# Altium PCB EGT_CAN.PcbDoc
Units mm, origin at the board's own origin, x right, y up, seen from the top; angles counter-clockwise.
Board outline 53.34 x 39.37 mm, 2 copper layers (Top Layer, Bottom Layer); 29 components, 12 nets, 64 pads, 14 vias.
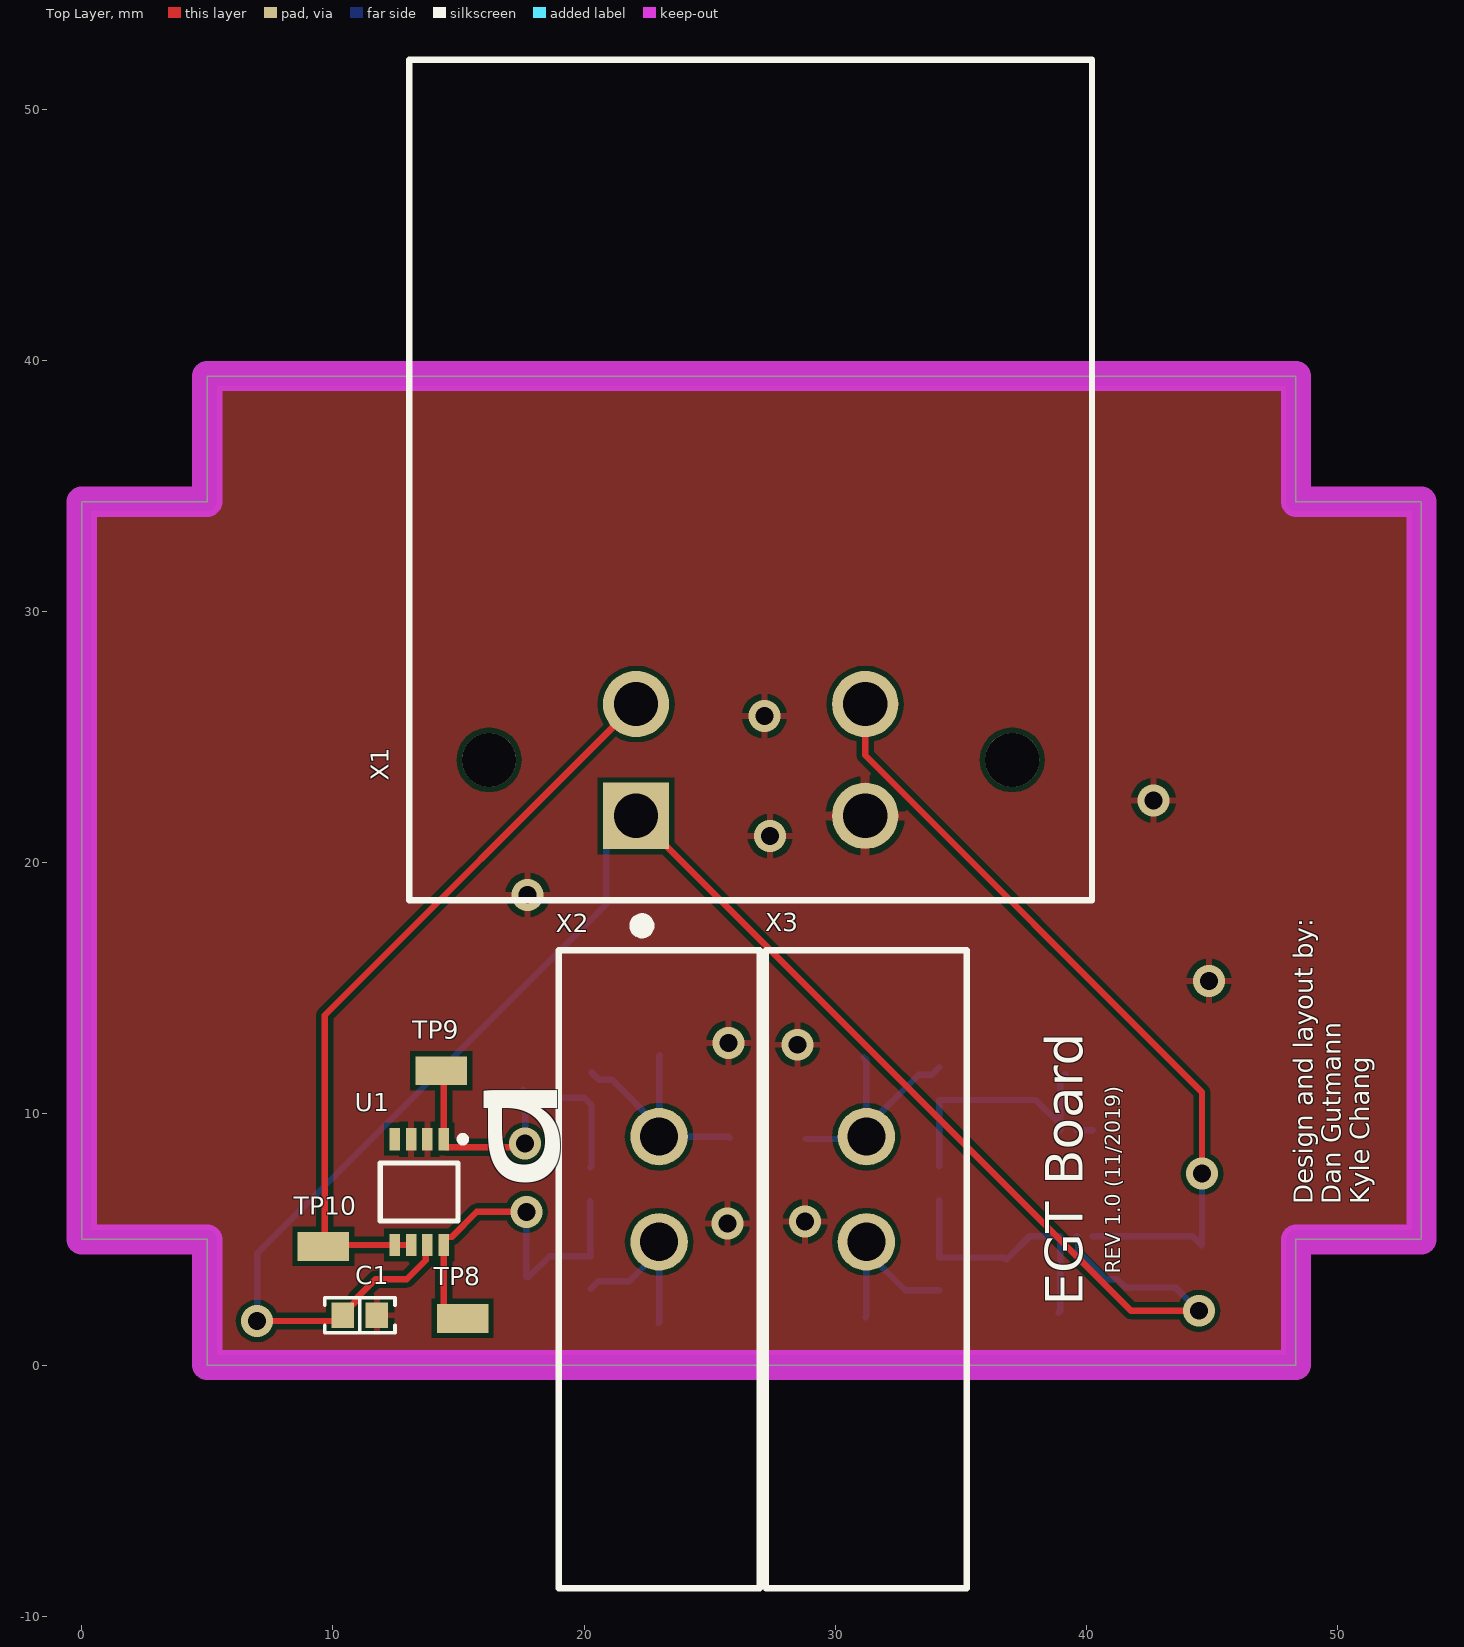
[diagram p0: Top Layer view]
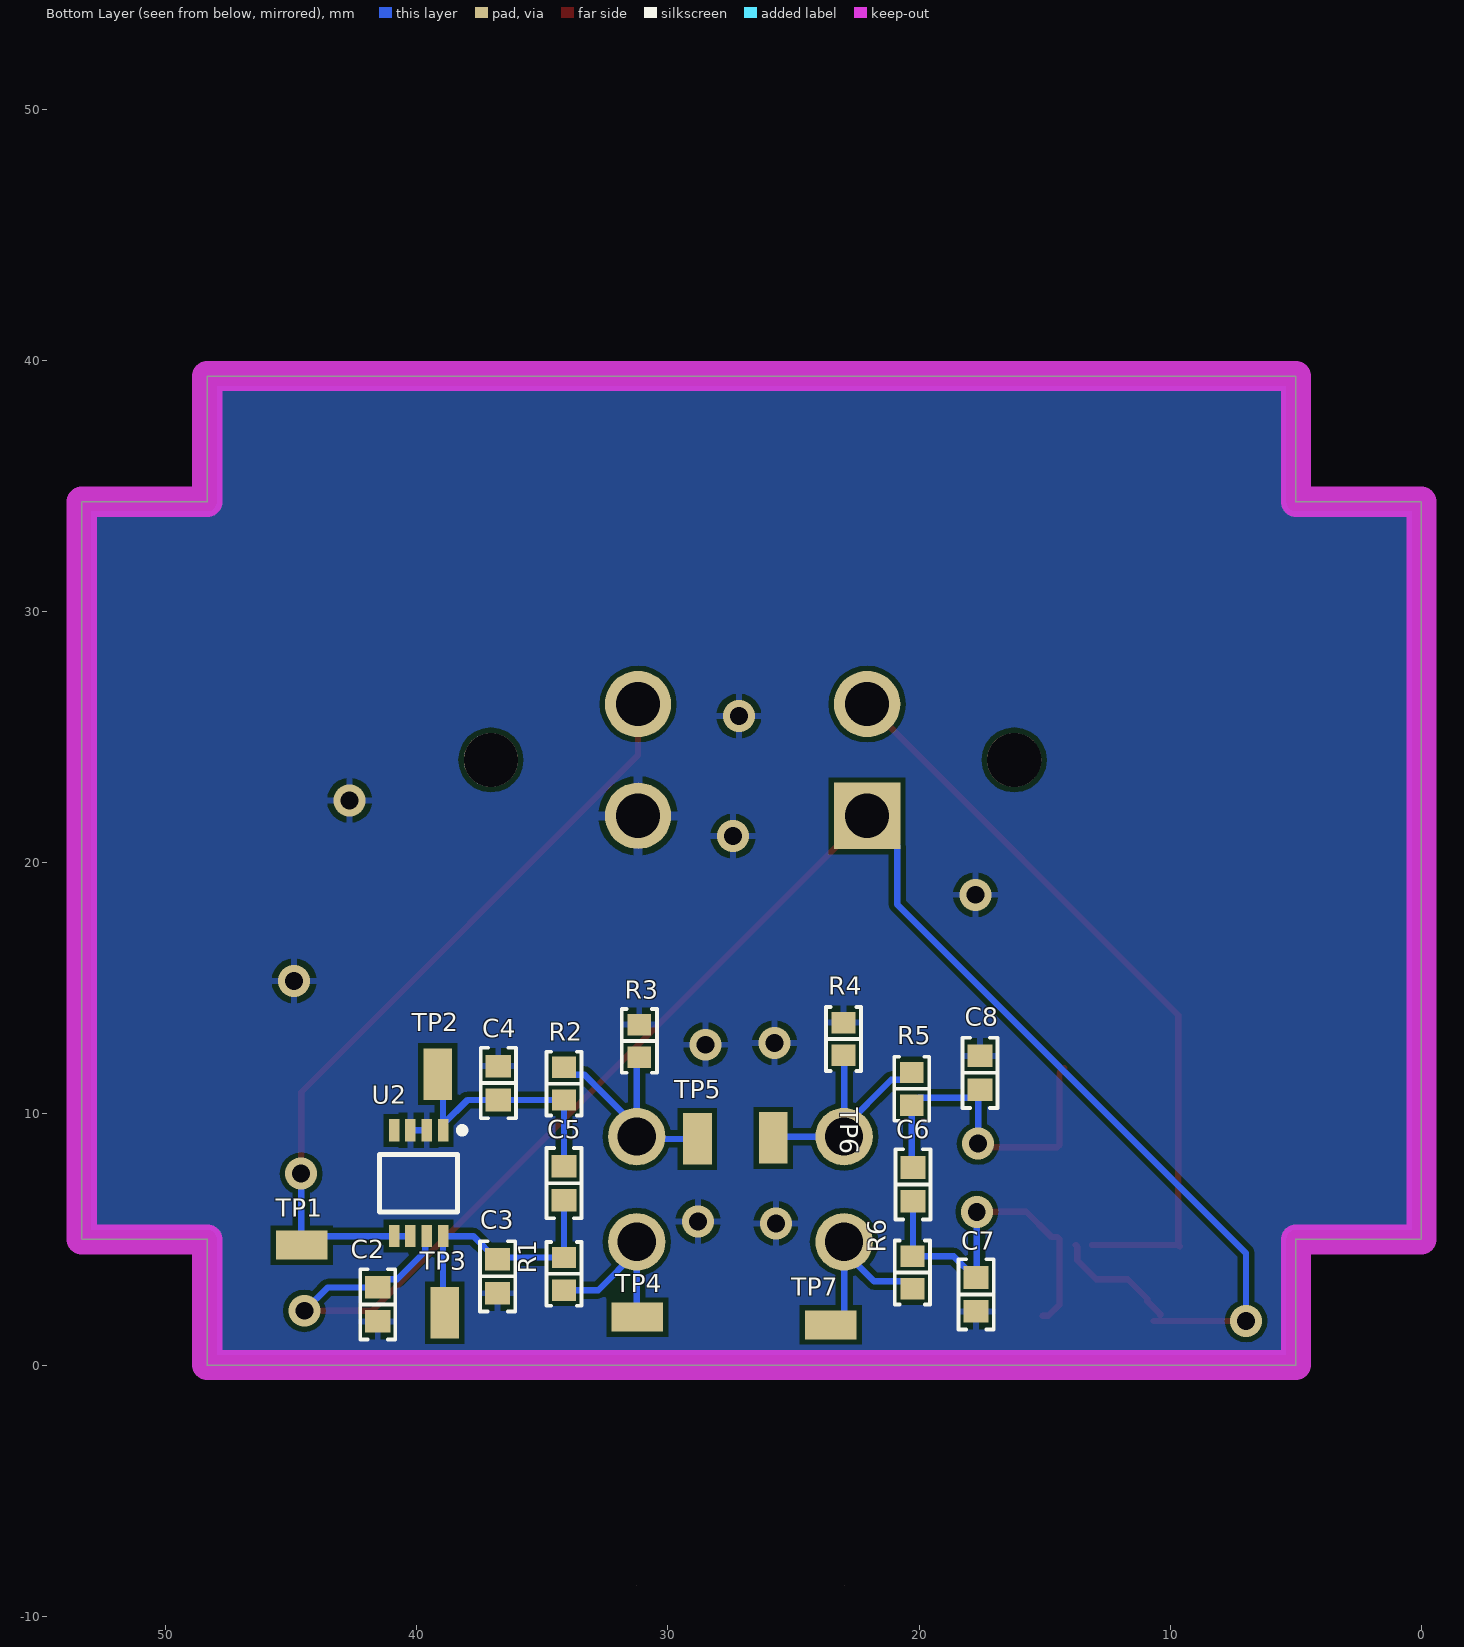
[diagram p1: Bottom Layer view, seen from below]

## Layer stack, top to bottom
Top Solder: solder mask 0.0102, Solder Resist, Dk 3.5
Top Layer: signal copper 0.0356
Dielectric 1: dielectric 0.32, FR-4, Dk 4.8
Bottom Layer: signal copper 0.0356
Bottom Solder: solder mask 0.0102, Solder Resist, Dk 3.5

## Board outline
0,5 0,34.37 5,34.37 5,39.37 48.34,39.37 48.34,34.37 53.34,34.37 53.34,5 48.34,5 48.34,0 5,0 5,5

## Design rules (kind name [scope] priority, off if disabled: settings)
BoardOutlineClearance [All] p1: gap=0.254 ignorepadtopadclearanceinfootprint=FALSE except(0: Arc-SplitContinuation Track-SplitContinuation SMDPad-SplitContinuation THPad-SplitContinuation Via-SplitContinuation Fill-SplitContinuation Poly-SplitContinuation Region-SplitContinuation Text-SplitContinuation; 0.381: Arc-OutlineEdge Track-OutlineEdge SMDPad-OutlineEdge THPad-OutlineEdge Via-OutlineEdge Fill-OutlineEdge Poly-OutlineEdge Region-OutlineEdge Text-OutlineEdge)
Clearance [All] p1: gap=0.203 ignorepadtopadclearanceinfootprint=FALSE
MinimumSolderMaskSliver [All] p1 off: minsoldermaskwidth=0.152
PolygonConnect [All] p1: connectstyle=Relief reliefconductorwidth=0.254 reliefentries=4 polygonreliefangle="90 Angle" airgapwidth=0.254
RoutingVias [All] p1: holewidth=0.711 width=1.27 viastyle="Through Hole" minholewidth=0.711 minwidth=1.27 maxholewidth=0.711 maxwidth=1.27
SilkToSilkClearance [All] p1 off: silktosilkclearance=0.254
SilkToSolderMaskClearance [IsPad] p1 off: minsilkscreentomaskgap=0.254 clearancetoexposedcopper=TRUE
SolderMaskExpansion [All] p1: expansion=0.102
Width [All] p1: maxlimit=0.254 minlimit=0.254 preferedwidth=0.254
27 further rules are at their usual default settings.

## Classes and differential pairs
channel class ThermocoupleAmplifiersAD8497: TC1 TC2
component class TC2: C2 C3 C4 C5 R1 R2 R3 TP1 TP2 TP3 TP4 TP5 U2
component class TC1: C1 C6 C7 C8 R4 R5 R6 TP6 TP7 TP8 TP9 TP10 U1
component class Connectors: X1 X2

## Components (designator, comment, footprint, x,y, rotation, side; value= is the part's Value field where it differs from the comment)
C1 "capacitor" 0603 11.074,1.981 r180 top (schematic designator C4)
C2 "capacitor" 0603 41.554,2.413 r90 bottom (schematic designator C4)
C3 "capacitor" 0603 36.779,3.531 r270 bottom
C4 "capacitor" 0603 36.754,11.227 r270 bottom (schematic designator C2)
C5 "capacitor" 0603 34.138,7.239 r270 bottom (schematic designator C1)
C6 "capacitor" 0603 20.244,7.188 r270 bottom (schematic designator C1)
C7 "capacitor" 0603 17.729,2.809 r270 bottom (schematic designator C3)
C8 "capacitor" 0603 17.577,11.633 r270 bottom (schematic designator C2)
R1 "10k" "RES 0603/1608" 34.138,3.632 r270 bottom (schematic designator R2)
R2 "10k" "RES 0603/1608" 34.138,11.201 r270 bottom (schematic designator R1)
R3 "1M" "RES 0603/1608" 31.14,12.903 r270 bottom
R4 "1M" "RES 0603/1608" 23.012,12.979 r270 bottom (schematic designator R3)
R5 "10k" "RES 0603/1608" 20.295,10.998 r270 bottom (schematic designator R1)
R6 "10k" "RES 0603/1608" 20.269,3.683 r270 bottom (schematic designator R2)
TP1 "RCU-0C" RCU-0C#1 44.577,4.775 r270 bottom (schematic designator TP5)
TP2 "RCU-0C" RCU-0C#1 39.167,11.582 r0 bottom (schematic designator TP3)
TP3 "RCU-0C" RCU-0C#1 38.887,2.083 r0 bottom (schematic designator TP4)
TP4 "RCU-0C" RCU-0C#1 31.217,1.905 r270 bottom (schematic designator TP1)
TP5 "RCU-0C" RCU-0C#2 28.829,18.322 r0 bottom (schematic designator TP2)
TP6 "RCU-0C" RCU-0C#1 25.806,9.042 r0 bottom (schematic designator TP2)
TP7 "RCU-0C" RCU-0C#1 23.52,1.6 r270 bottom (schematic designator TP1)
TP8 "RCU-0C" RCU-0C#3 15.164,1.854 r270 bottom (schematic designator TP4)
TP9 "RCU-0C" RCU-0C#3 14.318,11.717 r270 bottom (schematic designator TP3)
TP10 "RCU-0C" RCU-0C#3 9.627,4.724 r270 bottom (schematic designator TP5)
U1 "AD8497" MSOP-8 13.437,6.883 r270 top
U2 "AD8497" MSOP-8 39.929,7.239 r270 bottom (schematic designator U1)
X1 "" DTF13-4P 26.632,24.087 r180 top (schematic designator X3)
X2 "KTYPE TC CONN" "KTYPE TC CONN" 18.986,-8.89 r0 top (schematic designator X1)
X3 "KTYPE TC CONN" "KTYPE TC CONN" 27.241,-8.89 r0 top (schematic designator X2)

## Footprints (in the part's own frame and the unit in brackets; to place one, negate y for a bottom-side part, rotate by r counter-clockwise, add the part's x,y. Pads: shape width x height; smd on the part's side, far side on the other; paste and mask are expansions set on the pad)
0603 [mm]
  rect 0.9x1 smd: 1(-0.675,0) 2(0.675,0)
  silkscreen extent -1.4,-0.7 1.4,0.7, body extent -0.8,-0.41 0.8,0.41, height 0.82
DTF13-4P [mm]
  rect 2.64x2.64 hole 1.76: 1(4.561,2.223)
  round 2.64 hole 1.76: 2(4.561,-2.227) 3(-4.559,-2.227) 4(-4.559,2.223)
  round 2.16 hole 2.16 unplated: None(-10.415,0) None(10.415,0)
  silkscreen extent -13.59,-27.88 13.59,6.85, body extent -13.59,-27.94 13.59,5.52, height 23.53
"KTYPE TC CONN" [mil]
  round 90 hole 60: TC+(157.5,543) TC-(157.5,708)
  Keep-Out Layer region: 157.5,5
  silkscreen extent 0,0 315,1000
MSOP-8 [mm] "MSOP, 8-Leads, Body 3.00x3.00mmPitch 0.65mm, IPC MSOP65P490X110-8N, Medium Density, LTC2053, AD8495, LT6100HMS8PBF"
  rect 0.889x0.42 smd: 1(-2.105,0.975) 2(-2.105,0.325) 3(-2.105,-0.325) 4(-2.105,-0.975) 5(2.105,-0.975) 6(2.105,-0.325) 7(2.105,0.325) 8(2.105,0.975)
  silkscreen extent -2.23,-1.55 1.15,1.86, body extent -1.55,-1.55 1.55,1.55, height 1.1
RCU-0C#1 [mm]
  rect 1.15x2.05 smd: 1(0,0)
  body extent -0.6,-0.78 0.6,0.82, height 1.16
RCU-0C#2 [mm]
  rect 1.15x2.05 smd: 1(0,9.322)
  body extent -0.6,-0.78 0.6,0.82, height 1.16
RCU-0C#3 [mm]
  rect 1.15x2.05 smd far side: 1(0,0)
  body extent -0.6,-0.78 0.6,0.82, height 1.16
"RES 0603/1608" [mm] "Chip Resistor, 2-Leads, Body 1.60x0.80mm, IPC Medium Density"
  rect 0.85x0.95 smd: 1(-0.65,0) 2(0.65,0)
  silkscreen extent -1.27,-0.7 1.27,0.7, body extent -0.8,-0.4 0.8,0.4, height 0.45

## Part data
C1 C2: library part 1, "Generic 0603 capacitor", capacitance=0.1uF, Dielectric=Ceramic, package=0603, percent tolerance=10, voltage=50, ESR=1, id=1, name="0603 Capacitor", quantity=0
C3 C4 C7 C8: library part 1, "Generic 0603 capacitor", capacitance=1uF, Dielectric=Ceramic, package=0603, percent tolerance=10, voltage=50, ESR=1, id=1, name="0603 Capacitor", quantity=0
C5 C6: library part 1, "Generic 0603 capacitor", capacitance=10nF, Dielectric=Ceramic, package=0603, percent tolerance=10, voltage=50, ESR=1, id=1, name="0603 Capacitor", quantity=0
R1 R2 R3 R4 R5 R6: library part 1, package=0603, percent tolerance=5, id=1, name="0603 Resistor", quantity=0
  R1 R2 R5 R6: resistance=10k
  R3 R4: resistance=1M
TP1 TP2 TP3 TP4 TP5 TP6 TP7 TP8 TP9 TP10: library part 14, id=14, link=https://www.digikey.com/product-detail/en/te-connectivity-amp-connectors/RCU-0C/A106145CT-ND/3477802, name=RCU-0C, numcontacts=1, numrows=1, quantity=0
U1 U2: library part 1, currentoutput=0, voltage=15, gbw=0, id=1, link=https://www.digikey.com/product-detail/en/analog-devices-inc/AD8497ARMZ/AD8497ARMZ-ND/2404367, num_circuits=1, quantity=0, slewrate=0, voltagehigh=0, voltagelow=0
X1: library part 15, "DTF13-4P", id=15, link=https://www.te.com/usa-en/product-DTF13-4P.html, name=DTF13-4P, numcontacts=4, quantity=0
X2 X3: library part 35, "K type thermocouple vertical conn", package=1, createdby=gutmanndan, createddate="11/20/2019 7:50:17 PM", id=35, link=https://evosensors.com/products/k1x-femx-con-fp-x-pccs, name="KTYPE TC CONN", numcontacts=2, numrows=1, Pitch=0, quantity=0, updatedby=gutmanndan, updateddate="11/20/2019 7:50:17 PM"

## Via types
v1: diameter 1.27, hole 0.711, Top Layer to Bottom Layer, 14 vias

## Nets (pads, with @x,y where several pads share a name; then routed paths per layer and width w, separated by ;. In a path a pad name is that pad's centre, name@x,y a point inside that pad or via, vN(x,y) a via of type N, cw(c..) or ccw(c..) an arc to the next point about the centre after c; other vN are vias at no path point)
+IN_TC1: C6.2 C7.1 R6.1 TP8.1 U1.8 | length 14.9
  Top Layer w0.254: TP8.1@15.088,1.956 14.86,1.956 14.412,2.404 U1.8 14.412,5.012 14.495,5.095 14.729,5.095 15.73,6.096 v1(17.704,6.096)
  Bottom Layer w0.254: v1(17.704,6.096) 17.704,3.509 17.805,3.509 18.629,4.333 R6.1 20.244,4.358 C6.2
+IN_TC2: C3.1 C5.2 R1.1 TP3.1 U2.8 | length 10.6
  Bottom Layer w0.254: C5.2 R1.1 36.703,4.282 C3.1 36.829,4.206 37.757,5.134 U2.8 38.954,2.149 TP3.1
-IN_TC1: C6.1 C8.2 R5.2 TP9.1 U1.1 | length 14.1
  Top Layer w0.254: TP9.1@14.224,11.811 14.412,11.623 U1.1 14.412,8.754 14.495,8.671 17.511,8.671 v1(17.653,8.814)
  Bottom Layer w0.254: v1(17.653,8.814) 17.653,10.882 C8.2 17.9,10.635 20.008,10.635 R5.2 20.295,7.914 C6.1
-IN_TC2: C4.2 C5.1 R2.2 TP2.1 U2.1 | length 10.2
  Bottom Layer w0.254: C5.1 R2.2 C4.2 ; C4.2 37.981,10.552 U2.1@38.954,9.579 ; U2.1 U2.1@38.954,9.579 ; TP2.1 38.954,11.369 U2.1@38.954,9.579
AGND: C1.1 C2.1 C3.2 C4.1 C7.2 C8.1 R3.1 R4.1 U1.2 U1.3 U2.2 U2.3 X1.4 | length 0.6
  Bottom Layer w0.254: U2.2 U2.3
  other v1: 25.705,5.639 28.804,5.715 28.499,12.751 25.756,12.827 44.882,15.291 17.755,18.72 27.407,21.057 42.672,22.479 27.178,25.832
TC1+: R6.2 TP7.1 X2.TC+ | length 6.6
  Bottom Layer w0.254: R6.2 20.567,3.331 21.797,3.331 X2.TC+@22.987,4.521 ; TP7.1@22.962,1.676 22.987,1.702 X2.TC+@22.987,4.521 ; X2.TC+ X2.TC+@22.987,4.521
TC1-: R4.2 R5.1 TP6.1 X2.TC- | length 9.7
  Bottom Layer w0.254: R5.1 20.593,11.35 21.111,11.35 X2.TC-@22.987,9.474 ; R4.2 22.987,12.304 X2.TC-@22.987,9.474 ; TP6.1 25.756,9.093 X2.TC- X2.TC-@22.987,9.474
TC2+: R1.2 TP4.1 X3.TC+ | length 6.5
  Bottom Layer w0.254: TP4.1 31.242,1.93 X3.TC+@31.242,4.521 ; X3.TC+ X3.TC+@31.242,4.521 ; R1.2 32.781,2.982 X3.TC+@31.242,4.521
TC2-: R2.1 R3.2 TP5.1 X3.TC- | length 9.5
  Bottom Layer w0.254: TP5.1 31.149,9 X3.TC- X3.TC-@31.242,9.474 ; R3.2 31.242,12.152 X3.TC-@31.242,9.474 ; R2.1 33.84,11.553 33.321,11.553 X3.TC-@31.242,9.474
TCO1: TP10.1 U1.5 U1.6 X1.2 | length 30.2
  Top Layer w0.254: TP10.1 TP10.1@9.677,4.775 ; U1.6 U1.5 9.68,4.778 TP10.1@9.677,4.775 ; X1.2 9.677,13.921 TP10.1@9.677,4.775
TCO2: TP1.1 U2.5 U2.6 X1.3 | length 31.6
  Top Layer w0.254: X1.3 31.191,24.27 44.602,10.859 v1(44.602,7.62)
  Bottom Layer w0.254: U2.6 U2.5 44.219,5.134 TP1.1 44.602,4.801 v1(44.602,7.62)
VCC: C1.2 C2.2 U1.7 U2.7 X1.1 | length 71.9
  Top Layer w0.254: v1(6.985,1.753) C1.2@10.653,1.753 ; C1.2 10.399,2.031 10.918,2.55 10.918,2.639 11.699,3.42 12.947,3.42 13.703,4.176 13.703,4.719 U1.7 ; X1.1 41.777,2.159 v1(44.475,2.159)
  Bottom Layer w0.254: v1(6.985,1.753) 6.985,4.454 20.878,18.347 20.878,20.671 X1.1 ; U2.7 39.663,5.075 39.663,4.531 40.783,3.411 41.231,3.411 C2.2 43.546,3.088 v1(44.475,2.159)
pads on no net: U1.4 U2.4 X1.None

## Polygon pours and split planes (outlines as drawn)
AGND on Bottom Layer "Bottom Layer-AGND" (solid, pour order 12): -5.893,43.79 59.919,43.79 59.919,-8.382 58.369,-9.931 -5.893,-9.931
no net on Bottom Layer "Bottom Layer-No Net" (solid, pour order 14): 70.79,11.405
AGND on Top Layer "Top Layer-AGND" (solid, remove dead copper, pour order 10): -3.353,43.231 55.372,43.231 55.905,42.697 55.905,-5.969 -1.829,-5.969 -3.937,-3.861

## Keep-outs
Keep-Out Layer:
  the board outline again, w1.2

## Silkscreen, mask and mechanical layers (free items; w line width, h text height)
Top Overlay:
  text "a" at 22.708,6.782 h20 r90
  text "Design and layout by: / Dan Gutmann / Kyle Chang" at 51.257,6.401 h0.75 r90
  text "REV 1.0 (11/2019)" at 41.351,3.632 h0.6 r90
  text "EGT Board" at 39.853,2.362 h1.5 r90
Mechanical 15:
  lines w0.254: 0,5 0,34.37 ; 5,0 48.34,0 ; 5,39.37 48.34,39.37 ; 53.34,5 53.34,34.37